# Altium PCB heart.PcbDoc (part 8 of 8)
Units mil, origin at the board's own origin, x right, y up, seen from the top; angles counter-clockwise.
Board outline 5000 x 6000 mil, 2 copper layers (Top Layer, Bottom Layer); 76 components, 43 nets, 328 pads, 50 vias.
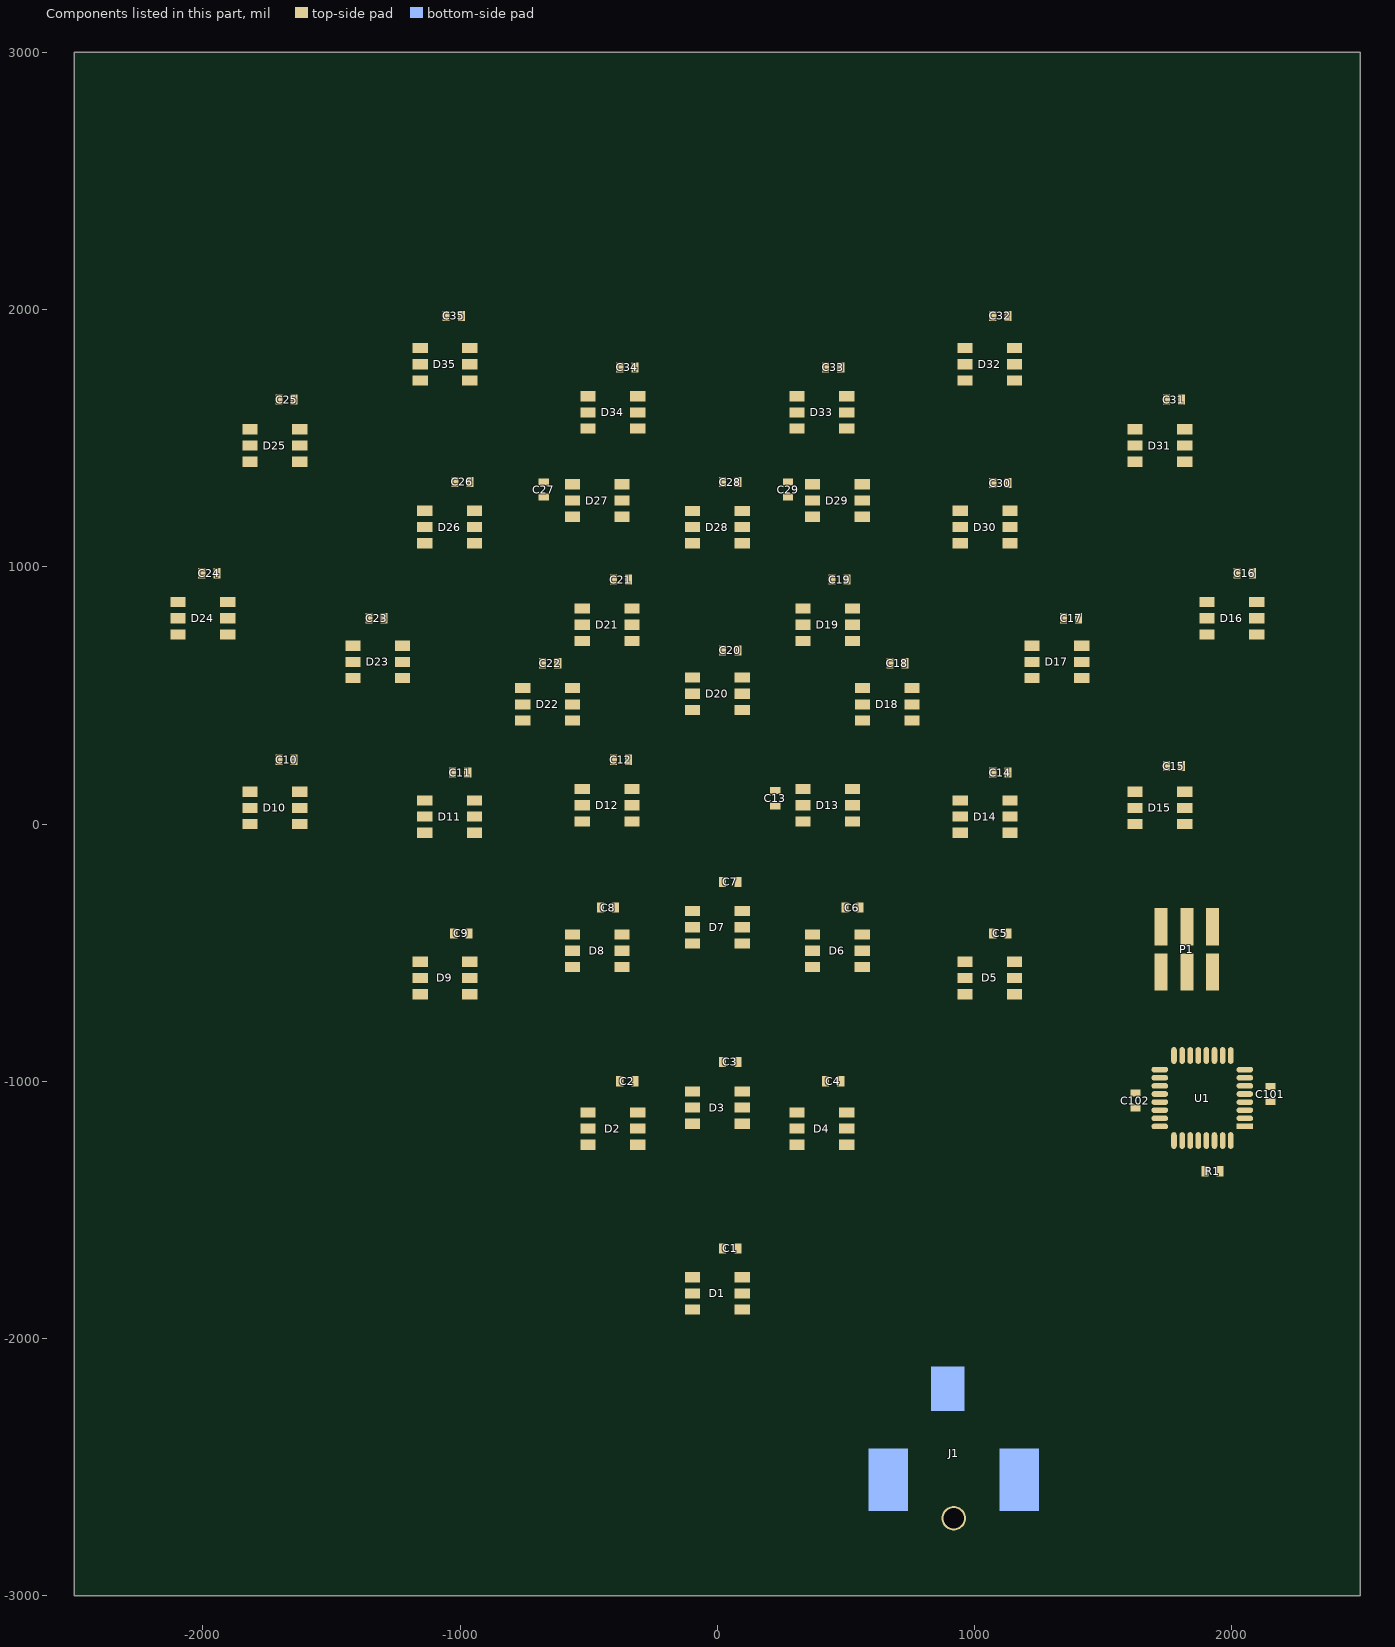
[diagram p8: the components of this part, seen from the top]

## Via types
v1: diameter 48, hole 20, Top Layer to Bottom Layer, 46 vias
v2: diameter 165, hole 150, Top Layer to Bottom Layer, 4 vias

## Nets (pads, with @x,y where several pads share a name; then routed paths per layer and width w, separated by ;. In a path a pad name is that pad's centre, name@x,y a point inside that pad or via, vN(x,y) a via of type N, cw(c..) or ccw(c..) an arc to the next point about the centre after c; other vN are vias at no path point) (continued)
copper on no net: (continued)
  Bottom Layer w2.65: -456.44,-1605.35 -437.85,-1605.35 ; -456.44,-1584.11 -427.23,-1584.11 ; -456.44,-1475.25 -440.51,-1475.25 ; -456.44,-1448.7 -437.85,-1448.7 ; -456.44,-1446.05 -437.85,-1446.05 ; -456.44,-1443.39 -437.85,-1443.39 ; -456.44,-1440.74 -437.85,-1440.74 ; -456.44,-1438.08 -435.2,-1438.08 ; -456.44,-1435.43 -435.2,-1435.43 ; -456.44,-1286.75 -443.16,-1286.75 ; -456.44,-1284.09 -440.51,-1284.09 ; -453.78,-2040.77 -437.85,-2040.77 ; -453.78,-2038.12 -440.51,-2038.12 ; -453.78,-1926.61 -443.16,-1926.61 ; -453.78,-1923.95 -440.51,-1923.95 ; -453.78,-1921.3 -440.51,-1921.3 ; -453.78,-1918.64 -440.51,-1918.64 ; -453.78,-1915.99 -440.51,-1915.99 ; -453.78,-1913.33 -440.51,-1913.33 ; -453.78,-1910.68 -440.51,-1910.68 ; -453.78,-1908.02 -421.92,-1908.02 ; -453.78,-1905.37 -424.58,-1905.37 ; -453.78,-1902.71 -424.58,-1902.71 ; -453.78,-1900.06 -427.23,-1900.06 ; -453.78,-1748.72 -421.92,-1748.72 ; -453.78,-1722.17 -435.2,-1722.17 ; -453.78,-1602.69 -437.85,-1602.69 ; -453.78,-1586.76 -429.89,-1586.76 ; -453.78,-1472.6 -440.51,-1472.6 ; -453.78,-1469.94 -440.51,-1469.94 ; -453.78,-1467.29 -440.51,-1467.29 ; -453.78,-1464.63 -440.51,-1464.63 ; -453.78,-1461.98 -440.51,-1461.98 ; -453.78,-1459.32 -440.51,-1459.32 ; -453.78,-1456.67 -440.51,-1456.67 ; -453.78,-1454.01 -440.51,-1454.01 ; -453.78,-1451.36 -440.51,-1451.36 ; -453.78,-1281.44 -440.51,-1281.44 ; -453.78,-1278.78 -437.85,-1278.78 ; -451.13,-2149.63 -424.58,-2149.63 ; -451.13,-2046.08 -435.2,-2046.08 ; -451.13,-2043.43 -437.85,-2043.43 ; -451.13,-1897.4 -427.23,-1897.4 ; -451.13,-1894.75 -429.89,-1894.75 ; -451.13,-1892.09 -429.89,-1892.09 ; -451.13,-1889.44 -432.54,-1889.44 ; -451.13,-1886.78 -432.54,-1886.78 ; -451.13,-1884.13 -432.54,-1884.13 ; -451.13,-1854.92 -432.54,-1854.92 ; -451.13,-1746.07 -421.92,-1746.07 ; -451.13,-1724.83 -432.54,-1724.83 ; -451.13,-1600.04 -435.2,-1600.04 ; -451.13,-1589.42 -429.89,-1589.42 ; -451.13,-1276.13 -435.2,-1276.13 ; -448.47,-2051.39 -432.54,-2051.39 ; -448.47,-2048.74 -435.2,-2048.74 ; -448.47,-1881.47 -432.54,-1881.47 ; -448.47,-1878.82 -432.54,-1878.82 ; -448.47,-1876.16 -435.2,-1876.16 ; -448.47,-1873.51 -435.2,-1873.51 ; -448.47,-1870.85 -435.2,-1870.85 ; -448.47,-1868.2 -435.2,-1868.2 ; -448.47,-1865.54 -435.2,-1865.54 ; -448.47,-1862.89 -435.2,-1862.89 ; -448.47,-1860.23 -435.2,-1860.23 ; -448.47,-1857.58 -435.2,-1857.58 ; -448.47,-1743.41 -424.58,-1743.41 ; -448.47,-1727.48 -432.54,-1727.48 ; -448.47,-1597.38 -435.2,-1597.38 ; -448.47,-1592.07 -432.54,-1592.07 ; -448.47,-1504.46 -432.54,-1504.46 ; -448.47,-1501.8 -435.2,-1501.8 ; -448.47,-1499.15 -435.2,-1499.15 ; -448.47,-1496.49 -435.2,-1496.49 ; -448.47,-1493.84 -435.2,-1493.84 ; -448.47,-1273.47 -432.54,-1273.47 ; -448.47,-1270.82 -427.23,-1270.82 ; -445.82,-2054.05 -429.89,-2054.05 ; -445.82,-1740.76 -424.58,-1740.76 ; -445.82,-1730.14 -429.89,-1730.14 ; -445.82,-1594.73 -432.54,-1594.73 ; -445.82,-1515.08 -432.54,-1515.08 ; -445.82,-1512.42 -432.54,-1512.42 ; -445.82,-1509.77 -432.54,-1509.77 ; -445.82,-1507.11 -432.54,-1507.11 ; -445.82,-1268.16 -421.92,-1268.16 ; -443.16,-2059.36 -421.92,-2059.36 ; -443.16,-2056.7 -427.23,-2056.7 ; -443.16,-1836.34 -429.89,-1836.34 ; -443.16,-1833.68 -429.89,-1833.68 ; -443.16,-1831.03 -429.89,-1831.03 ; -443.16,-1828.37 -429.89,-1828.37 ; -443.16,-1738.1 -427.23,-1738.1 ; -443.16,-1732.79 -427.23,-1732.79 ; -443.16,-1525.7 -429.89,-1525.7 ; -443.16,-1523.04 -429.89,-1523.04 ; -443.16,-1520.39 -429.89,-1520.39 ; -443.16,-1517.73 -429.89,-1517.73 ; -443.16,-1419.5 -424.58,-1419.5 ; -440.51,-2062.01 -416.61,-2062.01 ; -440.51,-1825.72 -427.23,-1825.72 ; -440.51,-1823.06 -427.23,-1823.06 ; -440.51,-1820.41 -427.23,-1820.41 ; -440.51,-1817.75 -427.23,-1817.75 ; -440.51,-1735.45 -427.23,-1735.45 ; -440.51,-1576.14 -427.23,-1576.14 ; -440.51,-1538.97 -403.34,-1538.97 ; -440.51,-1536.32 -408.65,-1536.32 ; -440.51,-1533.66 -427.23,-1533.66 ; -440.51,-1531.01 -427.23,-1531.01 ; -440.51,-1528.35 -427.23,-1528.35 ; -440.51,-1416.84 -421.92,-1416.84 ; -440.51,-1265.51 -379.44,-1265.51 ; -437.85,-2229.28 -408.65,-2229.28 ; -437.85,-2064.67 -374.13,-2064.67 ; -437.85,-1910.68 -419.27,-1910.68 ; -437.85,-1815.1 -424.58,-1815.1 ; -437.85,-1812.44 -424.58,-1812.44 ; -437.85,-1809.79 -424.58,-1809.79 ; -437.85,-1807.13 -424.58,-1807.13 ; -437.85,-1804.48 -421.92,-1804.48 ; -437.85,-1573.49 -427.23,-1573.49 ; -437.85,-1570.83 -424.58,-1570.83 ; -437.85,-1568.18 -424.58,-1568.18 ; -437.85,-1565.52 -424.58,-1565.52 ; -437.85,-1562.87 -424.58,-1562.87 ; -437.85,-1560.21 -424.58,-1560.21 ; -437.85,-1557.56 -424.58,-1557.56 ; -437.85,-1554.9 -424.58,-1554.9 ; -437.85,-1552.25 -421.92,-1552.25 ; -437.85,-1549.59 -419.27,-1549.59 ; -437.85,-1546.94 -416.61,-1546.94 ; -437.85,-1544.28 -413.96,-1544.28 ; -437.85,-1541.63 -400.68,-1541.63 ; -437.85,-1414.19 -419.27,-1414.19 ; -437.85,-1262.85 -382.1,-1262.85 ; -435.2,-2067.32 -376.79,-2067.32 ; -435.2,-1913.33 -416.61,-1913.33 ; -435.2,-1801.82 -421.92,-1801.82 ; -435.2,-1799.17 -421.92,-1799.17 ; -435.2,-1796.51 -421.92,-1796.51 ; -435.2,-1793.86 -400.68,-1793.86 ; -435.2,-1411.53 -413.96,-1411.53 ; -435.2,-1260.2 -387.41,-1260.2 ; -432.54,-1915.99 -413.96,-1915.99 ; -432.54,-1791.2 -398.03,-1791.2 ; -432.54,-1788.55 -403.34,-1788.55 ; -432.54,-1785.89 -408.65,-1785.89 ; -432.54,-1783.24 -411.3,-1783.24 ; -432.54,-1780.58 -413.96,-1780.58 ; -432.54,-1777.93 -416.61,-1777.93 ; -432.54,-1775.27 -419.27,-1775.27 ; -432.54,-1772.62 -419.27,-1772.62 ; -432.54,-1769.96 -419.27,-1769.96 ; -432.54,-1767.31 -419.27,-1767.31 ; -432.54,-1764.65 -419.27,-1764.65 ; -432.54,-1762 -419.27,-1762 ; -432.54,-1759.34 -419.27,-1759.34 ; -432.54,-1756.69 -419.27,-1756.69 ; -432.54,-1754.03 -421.92,-1754.03 ; -432.54,-1408.88 -411.3,-1408.88 ; -432.54,-1286.75 -390.06,-1286.75 ; -429.89,-2250.52 -307.76,-2250.52 ; -429.89,-2226.63 -405.99,-2226.63 ; -429.89,-2069.98 -379.44,-2069.98 ; -429.89,-1918.64 -411.3,-1918.64 ; -429.89,-1406.22 -405.99,-1406.22 ; -429.89,-1284.09 -392.72,-1284.09 ; -429.89,-1257.54 -390.06,-1257.54 ; -427.23,-2162.91 -403.34,-2162.91 ; -427.23,-1921.3 -405.99,-1921.3 ; -427.23,-1403.57 -395.37,-1403.57 ; -427.23,-1289.4 -390.06,-1289.4 ; -427.23,-1281.44 -395.37,-1281.44 ; -424.58,-2223.97 -403.34,-2223.97 ; -424.58,-2072.63 -384.75,-2072.63 ; -424.58,-1923.95 -400.68,-1923.95 ; -424.58,-1236.3 -416.61,-1236.3 ; -421.92,-2247.87 -307.76,-2247.87 ; -421.92,-2165.56 -400.68,-2165.56 ; -421.92,-1926.61 -392.72,-1926.61 ; -421.92,-1400.91 -331.65,-1400.91 ; -421.92,-1292.06 -387.41,-1292.06 ; -421.92,-1278.78 -398.03,-1278.78 ; -419.27,-2221.32 -400.68,-2221.32 ; -419.27,-1398.26 -352.89,-1398.26 ; -419.27,-1254.89 -392.72,-1254.89 ; -416.61,-2245.21 -307.76,-2245.21 ; -416.61,-2218.66 -400.68,-2218.66 ; -416.61,-2168.22 -400.68,-2168.22 ; -416.61,-2075.29 -387.41,-2075.29 ; -416.61,-1929.26 -326.34,-1929.26 ; -416.61,-1294.71 -387.41,-1294.71 ; -413.96,-2216.01 -398.03,-2216.01 ; -413.96,-2173.53 -398.03,-2173.53 ; -413.96,-2170.87 -398.03,-2170.87 ; -413.96,-1931.92 -323.69,-1931.92 ; -413.96,-1395.6 -358.2,-1395.6 ; -413.96,-1276.13 -405.99,-1276.13 ; -411.3,-2242.56 -307.76,-2242.56 ; -411.3,-2213.35 -398.03,-2213.35 ; -411.3,-2176.18 -395.37,-2176.18 ; -411.3,-1228.34 -403.34,-1228.34 ; -408.65,-2239.9 -307.76,-2239.9 ; -408.65,-2210.7 -395.37,-2210.7 ; -408.65,-2208.04 -395.37,-2208.04 ; -408.65,-2181.49 -392.72,-2181.49 ; -408.65,-2178.84 -395.37,-2178.84 ; -408.65,-1934.57 -350.24,-1934.57 ; -408.65,-1297.37 -387.41,-1297.37 ; -408.65,-1252.23 -392.72,-1252.23 ; -408.65,-1249.58 -392.72,-1249.58 ; -408.65,-1246.92 -395.37,-1246.92 ; -405.99,-2205.39 -392.72,-2205.39 ; -405.99,-2202.73 -368.82,-2202.73 ; -405.99,-2200.08 -371.48,-2200.08 ; -405.99,-2197.42 -374.13,-2197.42 ; -405.99,-2194.77 -376.79,-2194.77 ; -405.99,-2192.11 -382.1,-2192.11 ; -405.99,-2189.46 -387.41,-2189.46 ; -405.99,-2186.8 -392.72,-2186.8 ; -405.99,-2184.15 -392.72,-2184.15 ; -405.99,-2104.49 -403.34,-2104.49 ; -405.99,-1392.95 -363.51,-1392.95 ; -405.99,-1339.85 -395.37,-1339.85 ; -405.99,-1337.19 -387.41,-1337.19 ; -405.99,-1305.33 -387.41,-1305.33 ; -405.99,-1302.68 -387.41,-1302.68 ; -405.99,-1300.02 -387.41,-1300.02 ; -405.99,-1244.27 -395.37,-1244.27 ; -405.99,-1241.61 -395.37,-1241.61 ; -405.99,-1238.96 -395.37,-1238.96 ; -405.99,-1236.3 -398.03,-1236.3 ; -405.99,-1233.65 -398.03,-1233.65 ; -405.99,-1230.99 -400.68,-1230.99 ; -405.99,-1217.72 -307.76,-1217.72 ; -403.34,-2237.25 -307.76,-2237.25 ; -403.34,-2101.84 -398.03,-2101.84 ; -403.34,-2083.25 -387.41,-2083.25 ; -403.34,-2080.6 -387.41,-2080.6 ; -403.34,-2077.94 -387.41,-2077.94 ; -403.34,-1937.23 -358.2,-1937.23 ; -403.34,-1310.64 -390.06,-1310.64 ; -403.34,-1307.99 -387.41,-1307.99 ; -400.68,-2234.59 -382.1,-2234.59 ; -400.68,-2099.18 -395.37,-2099.18 ; -400.68,-2096.53 -392.72,-2096.53 ; -400.68,-2093.87 -390.06,-2093.87 ; -400.68,-2091.22 -390.06,-2091.22 ; -400.68,-2088.56 -390.06,-2088.56 ; -400.68,-2085.91 -390.06,-2085.91 ; -400.68,-1992.98 -382.1,-1992.98 ; -400.68,-1334.54 -382.1,-1334.54 ; -400.68,-1318.61 -395.37,-1318.61 ; -400.68,-1315.95 -392.72,-1315.95 ; -400.68,-1313.3 -390.06,-1313.3 ; -400.68,-1268.16 -376.79,-1268.16 ; -398.03,-2231.94 -384.75,-2231.94 ; -398.03,-1990.33 -392.72,-1990.33 ; -398.03,-1788.55 -395.37,-1788.55 ; -398.03,-1220.37 -307.76,-1220.37 ; -395.37,-2229.28 -384.75,-2229.28 ; -395.37,-2157.6 -307.76,-2157.6 ; -395.37,-2154.94 -307.76,-2154.94 ; -395.37,-2152.28 -307.76,-2152.28 ; -395.37,-2149.63 -307.76,-2149.63 ; -395.37,-2146.97 -307.76,-2146.97 ; -395.37,-2144.32 -307.76,-2144.32 ; -395.37,-2141.66 -307.76,-2141.66 ; -395.37,-2139.01 -307.76,-2139.01 ; -395.37,-2136.35 -307.76,-2136.35 ; -395.37,-2133.7 -307.76,-2133.7 ; -395.37,-2131.04 -307.76,-2131.04 ; -395.37,-2128.39 -307.76,-2128.39 ; -395.37,-2125.73 -307.76,-2125.73 ; -395.37,-2123.08 -307.76,-2123.08 ; -395.37,-2120.42 -307.76,-2120.42 ; -395.37,-2117.77 -307.76,-2117.77 ; -395.37,-2115.11 -307.76,-2115.11 ; -395.37,-2112.46 -307.76,-2112.46 ; -395.37,-2051.39 -392.72,-2051.39 ; -395.37,-2048.74 -390.06,-2048.74 ; -395.37,-2046.08 -387.41,-2046.08 ; -395.37,-2043.43 -384.75,-2043.43 ; -395.37,-2040.77 -382.1,-2040.77 ; -395.37,-2038.12 -382.1,-2038.12 ; -395.37,-2035.46 -382.1,-2035.46 ; -395.37,-2032.81 -382.1,-2032.81 ; -395.37,-2030.15 -382.1,-2030.15 ; -395.37,-2027.5 -382.1,-2027.5 ; -395.37,-2024.84 -382.1,-2024.84 ; -395.37,-2022.19 -382.1,-2022.19 ; -395.37,-2019.53 -384.75,-2019.53 ; -395.37,-2016.88 -384.75,-2016.88 ; -395.37,-2014.22 -387.41,-2014.22 ; -395.37,-2011.57 -390.06,-2011.57 ; -395.37,-2008.91 -392.72,-2008.91 ; -395.37,-1995.64 -376.79,-1995.64 ; -395.37,-1979.71 -307.76,-1979.71 ; -395.37,-1977.05 -307.76,-1977.05 ; -395.37,-1974.4 -307.76,-1974.4 ; -395.37,-1971.74 -307.76,-1971.74 ; -395.37,-1969.09 -363.51,-1969.09 ; -395.37,-1966.43 -363.51,-1966.43 ; -395.37,-1963.78 -363.51,-1963.78 ; -395.37,-1961.12 -363.51,-1961.12 ; -395.37,-1958.47 -358.2,-1958.47 ; -395.37,-1955.81 -352.89,-1955.81 ; -395.37,-1953.16 -350.24,-1953.16 ; -395.37,-1950.5 -347.58,-1950.5 ; -395.37,-1915.99 -363.51,-1915.99 ; -395.37,-1913.33 -358.2,-1913.33 ; -395.37,-1910.68 -355.55,-1910.68 ; -395.37,-1908.02 -352.89,-1908.02 ; -395.37,-1905.37 -350.24,-1905.37 ; -395.37,-1902.71 -347.58,-1902.71 ; -395.37,-1900.06 -344.93,-1900.06 ; -395.37,-1897.4 -344.93,-1897.4 ; -395.37,-1894.75 -371.48,-1894.75 ; -395.37,-1892.09 -379.44,-1892.09 ; -395.37,-1889.44 -382.1,-1889.44 ; -395.37,-1886.78 -384.75,-1886.78 ; -395.37,-1884.13 -387.41,-1884.13 ; -395.37,-1881.47 -390.06,-1881.47 ; -395.37,-1878.82 -392.72,-1878.82 ; -395.37,-1876.16 -392.72,-1876.16 ; -395.37,-1844.3 -392.72,-1844.3 ; -395.37,-1841.65 -390.06,-1841.65 ; -395.37,-1838.99 -390.06,-1838.99 ; -395.37,-1836.34 -387.41,-1836.34 ; -395.37,-1833.68 -384.75,-1833.68 ; -395.37,-1831.03 -382.1,-1831.03 ; -395.37,-1828.37 -376.79,-1828.37 ; -395.37,-1825.72 -374.13,-1825.72 ; -395.37,-1823.06 -366.17,-1823.06 ; -395.37,-1820.41 -307.76,-1820.41 ; -395.37,-1817.75 -307.76,-1817.75 ; -395.37,-1815.1 -307.76,-1815.1 ; -395.37,-1812.44 -307.76,-1812.44 ; -395.37,-1809.79 -307.76,-1809.79 ; -395.37,-1807.13 -307.76,-1807.13 ; -395.37,-1804.48 -307.76,-1804.48 ; -395.37,-1801.82 -307.76,-1801.82 ; -395.37,-1767.31 -392.72,-1767.31 ; -395.37,-1764.65 -392.72,-1764.65 ; -395.37,-1762 -390.06,-1762 ; -395.37,-1759.34 -390.06,-1759.34 ; -395.37,-1756.69 -387.41,-1756.69 ; -395.37,-1754.03 -307.76,-1754.03 ; -395.37,-1751.38 -307.76,-1751.38 ; -395.37,-1748.72 -307.76,-1748.72 ; -395.37,-1746.07 -307.76,-1746.07 ; -395.37,-1743.41 -307.76,-1743.41 ; -395.37,-1740.76 -307.76,-1740.76 ; -395.37,-1738.1 -307.76,-1738.1 ; -395.37,-1735.45 -307.76,-1735.45 ; -395.37,-1732.79 -307.76,-1732.79 ; -395.37,-1730.14 -307.76,-1730.14 ; -395.37,-1727.48 -307.76,-1727.48 ; -395.37,-1724.83 -307.76,-1724.83 ; -395.37,-1722.17 -307.76,-1722.17 ; -395.37,-1719.52 -307.76,-1719.52 ; -395.37,-1716.86 -307.76,-1716.86 ; -395.37,-1714.21 -307.76,-1714.21 ; -395.37,-1711.55 -307.76,-1711.55 ; -395.37,-1708.9 -307.76,-1708.9 ; -395.37,-1706.24 -307.76,-1706.24 ; -395.37,-1703.59 -307.76,-1703.59 ; -395.37,-1700.93 -307.76,-1700.93 ; -395.37,-1698.28 -307.76,-1698.28 ; -395.37,-1695.62 -307.76,-1695.62 ; -395.37,-1692.97 -307.76,-1692.97 ; -395.37,-1690.31 -307.76,-1690.31 ; -395.37,-1687.66 -307.76,-1687.66 ; -395.37,-1685 -307.76,-1685 ; -395.37,-1682.35 -307.76,-1682.35 ; -395.37,-1679.69 -307.76,-1679.69 ; -395.37,-1677.04 -307.76,-1677.04 ; -395.37,-1674.38 -307.76,-1674.38 ; -395.37,-1671.73 -307.76,-1671.73 ; -395.37,-1669.07 -307.76,-1669.07 ; -395.37,-1666.42 -307.76,-1666.42 ; -395.37,-1663.76 -307.76,-1663.76 ; -395.37,-1661.11 -307.76,-1661.11 ; -395.37,-1658.45 -307.76,-1658.45 ; -395.37,-1655.8 -307.76,-1655.8 ; -395.37,-1653.14 -307.76,-1653.14 ; -395.37,-1650.49 -307.76,-1650.49 ; -395.37,-1647.83 -307.76,-1647.83 ; -395.37,-1645.18 -307.76,-1645.18 ; -395.37,-1642.52 -307.76,-1642.52 ; -395.37,-1639.86 -307.76,-1639.86 ; -395.37,-1637.21 -307.76,-1637.21 ; -395.37,-1634.55 -307.76,-1634.55 ; -395.37,-1631.9 -307.76,-1631.9 ; -395.37,-1629.24 -307.76,-1629.24 ; -395.37,-1626.59 -307.76,-1626.59 ; -395.37,-1623.93 -307.76,-1623.93 ; -395.37,-1621.28 -307.76,-1621.28 ; -395.37,-1618.62 -307.76,-1618.62 ; -395.37,-1615.97 -307.76,-1615.97 ; -395.37,-1613.31 -307.76,-1613.31 ; -395.37,-1610.66 -307.76,-1610.66 ; -395.37,-1608 -307.76,-1608 ; -395.37,-1605.35 -307.76,-1605.35 ; -395.37,-1602.69 -307.76,-1602.69 ; -395.37,-1600.04 -307.76,-1600.04 ; -395.37,-1597.38 -307.76,-1597.38 ; -395.37,-1594.73 -307.76,-1594.73 ; -395.37,-1592.07 -307.76,-1592.07 ; -395.37,-1589.42 -307.76,-1589.42 ; -395.37,-1586.76 -307.76,-1586.76 ; -395.37,-1584.11 -307.76,-1584.11 ; -395.37,-1581.45 -307.76,-1581.45 ; -395.37,-1578.8 -307.76,-1578.8 ; -395.37,-1576.14 -307.76,-1576.14 ; -395.37,-1533.66 -307.76,-1533.66 ; -395.37,-1531.01 -307.76,-1531.01 ; -395.37,-1528.35 -307.76,-1528.35 ; -395.37,-1525.7 -307.76,-1525.7 ; -395.37,-1523.04 -307.76,-1523.04 ; -395.37,-1520.39 -307.76,-1520.39 ; -395.37,-1517.73 -307.76,-1517.73 ; -395.37,-1515.08 -307.76,-1515.08 ; -395.37,-1512.42 -307.76,-1512.42 ; -395.37,-1509.77 -307.76,-1509.77 ; -395.37,-1507.11 -374.13,-1507.11 ; -395.37,-1504.46 -379.44,-1504.46 ; -395.37,-1501.8 -384.75,-1501.8 ; -395.37,-1499.15 -387.41,-1499.15 ; -395.37,-1496.49 -390.06,-1496.49 ; -395.37,-1443.39 -390.06,-1443.39 ; -395.37,-1440.74 -387.41,-1440.74 ; -395.37,-1438.08 -382.1,-1438.08 ; -395.37,-1435.43 -347.58,-1435.43 ; -395.37,-1432.77 -350.24,-1432.77 ; -395.37,-1430.12 -350.24,-1430.12 ; -395.37,-1427.46 -352.89,-1427.46 ; -395.37,-1424.81 -355.55,-1424.81 ; -395.37,-1422.15 -358.2,-1422.15 ; -395.37,-1419.5 -360.86,-1419.5 ; -395.37,-1416.84 -366.17,-1416.84 ; -395.37,-1414.19 -371.48,-1414.19 ; -395.37,-1390.29 -376.79,-1390.29 ; -395.37,-1379.67 -352.89,-1379.67 ; -395.37,-1377.02 -355.55,-1377.02 ; -395.37,-1374.36 -360.86,-1374.36 ; -395.37,-1371.71 -363.51,-1371.71 ; -395.37,-1369.05 -368.82,-1369.05 ; -395.37,-1366.4 -368.82,-1366.4 ; -395.37,-1363.74 -368.82,-1363.74 ; -395.37,-1361.09 -368.82,-1361.09 ; -395.37,-1358.43 -307.76,-1358.43 ; -395.37,-1355.78 -307.76,-1355.78 ; -395.37,-1353.12 -307.76,-1353.12 ; -395.37,-1350.47 -307.76,-1350.47 ; -395.37,-1331.88 -379.44,-1331.88 ; -395.37,-1270.82 -374.13,-1270.82 ; -395.37,-1223.03 -307.76,-1223.03 ; -392.72,-2226.63 -382.1,-2226.63 ; -392.72,-2223.97 -382.1,-2223.97 ; -392.72,-2162.91 -307.76,-2162.91 ; -392.72,-2160.25 -307.76,-2160.25 ; -392.72,-2109.8 -307.76,-2109.8 ; -392.72,-2062.01 -371.48,-2062.01 ; -392.72,-1939.88 -366.17,-1939.88 ; -392.72,-1799.17 -307.76,-1799.17 ; -392.72,-1573.49 -307.76,-1573.49 ; -392.72,-1538.97 -307.76,-1538.97 ; -392.72,-1536.32 -307.76,-1536.32 ; -392.72,-1477.91 -382.1,-1477.91 ; -392.72,-1475.25 -382.1,-1475.25 ; -392.72,-1472.6 -384.75,-1472.6 ; -392.72,-1469.94 -384.75,-1469.94 ; -392.72,-1467.29 -384.75,-1467.29 ; -392.72,-1464.63 -384.75,-1464.63 ; -392.72,-1461.98 -384.75,-1461.98 ; -392.72,-1329.23 -376.79,-1329.23 ; -392.72,-1225.68 -307.76,-1225.68 ; -390.06,-2221.32 -379.44,-2221.32 ; -390.06,-2218.66 -379.44,-2218.66 ; -390.06,-2168.22 -307.76,-2168.22 ; -390.06,-2165.56 -307.76,-2165.56 ; -390.06,-2107.15 -307.76,-2107.15 ; -390.06,-1998.29 -374.13,-1998.29 ; -390.06,-1796.51 -307.76,-1796.51 ; -390.06,-1570.83 -307.76,-1570.83 ; -390.06,-1568.18 -307.76,-1568.18 ; -390.06,-1565.52 -307.76,-1565.52 ; -390.06,-1562.87 -307.76,-1562.87 ; -390.06,-1560.21 -307.76,-1560.21 ; -390.06,-1557.56 -307.76,-1557.56 ; -390.06,-1554.9 -307.76,-1554.9 ; -390.06,-1552.25 -307.76,-1552.25 ; -390.06,-1549.59 -307.76,-1549.59 ; -390.06,-1546.94 -307.76,-1546.94 ; -390.06,-1544.28 -307.76,-1544.28 ; -390.06,-1541.63 -307.76,-1541.63 ; -390.06,-1483.22 -376.79,-1483.22 ; -390.06,-1480.56 -379.44,-1480.56 ; -390.06,-1459.32 -384.75,-1459.32 ; -390.06,-1456.67 -384.75,-1456.67 ; -390.06,-1347.81 -307.76,-1347.81 ; -390.06,-1326.57 -374.13,-1326.57 ; -390.06,-1273.47 -371.48,-1273.47 ; -390.06,-1230.99 -307.76,-1230.99 ; -390.06,-1228.34 -307.76,-1228.34 ; -387.41,-2216.01 -376.79,-2216.01 ; -387.41,-2173.53 -307.76,-2173.53 ; -387.41,-2170.87 -307.76,-2170.87 ; -387.41,-2104.49 -307.76,-2104.49 ; -387.41,-2059.36 -368.82,-2059.36 ; -387.41,-2000.95 -371.48,-2000.95 ; -387.41,-1868.2 -379.44,-1868.2 ; -387.41,-1865.54 -379.44,-1865.54 ; -387.41,-1862.89 -379.44,-1862.89 ; -387.41,-1860.23 -379.44,-1860.23 ; -387.41,-1857.58 -379.44,-1857.58 ; -387.41,-1854.92 -376.79,-1854.92 ; -387.41,-1793.86 -307.76,-1793.86 ; -387.41,-1488.53 -336.96,-1488.53 ; -387.41,-1485.87 -371.48,-1485.87 ; -387.41,-1454.01 -384.75,-1454.01 ; -387.41,-1451.36 -382.1,-1451.36 ; -387.41,-1323.92 -371.48,-1323.92 ; -387.41,-1276.13 -371.48,-1276.13 ; -387.41,-1238.96 -307.76,-1238.96 ; -387.41,-1236.3 -307.76,-1236.3 ; -387.41,-1233.65 -307.76,-1233.65 ; -384.75,-2178.84 -307.76,-2178.84 ; -384.75,-2176.18 -307.76,-2176.18 ; -384.75,-2101.84 -307.76,-2101.84 ; -384.75,-2099.18 -307.76,-2099.18 ; -384.75,-2056.7 -366.17,-2056.7 ; -384.75,-2003.6 -368.82,-2003.6 ; -384.75,-1982.36 -307.76,-1982.36 ; -384.75,-1918.64 -374.13,-1918.64 ; -384.75,-1873.51 -379.44,-1873.51 ; -384.75,-1870.85 -379.44,-1870.85 ; -384.75,-1852.27 -374.13,-1852.27 ; -384.75,-1849.61 -371.48,-1849.61 ; -384.75,-1846.96 -368.82,-1846.96 ; -384.75,-1791.2 -307.76,-1791.2 ; -384.75,-1788.55 -307.76,-1788.55 ; -384.75,-1785.89 -307.76,-1785.89 ; -384.75,-1783.24 -307.76,-1783.24 ; -384.75,-1777.93 -307.76,-1777.93 ; -384.75,-1775.27 -307.76,-1775.27 ; -384.75,-1772.62 -307.76,-1772.62 ; -384.75,-1769.96 -307.76,-1769.96 ; -384.75,-1767.31 -307.76,-1767.31 ; -384.75,-1764.65 -307.76,-1764.65 ; -384.75,-1762 -307.76,-1762 ; -384.75,-1759.34 -307.76,-1759.34 ; -384.75,-1756.69 -307.76,-1756.69 ; -384.75,-1491.18 -339.62,-1491.18 ; -384.75,-1321.26 -368.82,-1321.26 ; -384.75,-1278.78 -368.82,-1278.78 ; -384.75,-1249.58 -307.76,-1249.58 ; -384.75,-1246.92 -307.76,-1246.92 ; -384.75,-1244.27 -307.76,-1244.27 ; -384.75,-1241.61 -307.76,-1241.61 ; -382.1,-2181.49 -307.76,-2181.49 ; -382.1,-2096.53 -307.76,-2096.53 ; -382.1,-2093.87 -307.76,-2093.87 ; -382.1,-2091.22 -307.76,-2091.22 ; -382.1,-2054.05 -366.17,-2054.05 ; -382.1,-2006.26 -366.17,-2006.26 ; -382.1,-1878.82 -376.79,-1878.82 ; -382.1,-1876.16 -379.44,-1876.16 ; -382.1,-1844.3 -363.51,-1844.3 ; -382.1,-1780.58 -307.76,-1780.58 ; -382.1,-1345.16 -307.76,-1345.16 ; -382.1,-1318.61 -368.82,-1318.61 ; -382.1,-1315.95 -368.82,-1315.95 ; -382.1,-1284.09 -366.17,-1284.09 ; -382.1,-1281.44 -368.82,-1281.44 ; -382.1,-1252.23 -307.76,-1252.23 ; -379.44,-2088.56 -307.76,-2088.56 ; -379.44,-2085.91 -307.76,-2085.91 ; -379.44,-2083.25 -307.76,-2083.25 ; -379.44,-2080.6 -307.76,-2080.6 ; -379.44,-2051.39 -363.51,-2051.39 ; -379.44,-2008.91 -363.51,-2008.91 ; -379.44,-1985.02 -307.76,-1985.02 ; -379.44,-1841.65 -331.65,-1841.65 ; -379.44,-1493.84 -344.93,-1493.84 ; -379.44,-1342.5 -307.76,-1342.5 ; -379.44,-1313.3 -366.17,-1313.3 ; -379.44,-1310.64 -366.17,-1310.64 ; -379.44,-1307.99 -366.17,-1307.99 ; -379.44,-1305.33 -363.51,-1305.33 ; -379.44,-1292.06 -366.17,-1292.06 ; -379.44,-1289.4 -366.17,-1289.4 ; -379.44,-1286.75 -366.17,-1286.75 ; -379.44,-1254.89 -307.76,-1254.89 ; -376.79,-2205.39 -368.82,-2205.39 ; -376.79,-2184.15 -307.76,-2184.15 ; -376.79,-2048.74 -363.51,-2048.74 ; -376.79,-2046.08 -360.86,-2046.08 ; -376.79,-2014.22 -363.51,-2014.22 ; -376.79,-2011.57 -363.51,-2011.57 ; -376.79,-1881.47 -374.13,-1881.47 ; -376.79,-1838.99 -334.31,-1838.99 ; -376.79,-1467.29 -350.24,-1467.29 ; -376.79,-1464.63 -347.58,-1464.63 ; -376.79,-1461.98 -347.58,-1461.98 ; -376.79,-1459.32 -344.93,-1459.32 ; -376.79,-1403.57 -331.65,-1403.57 ; -376.79,-1302.68 -363.51,-1302.68 ; -376.79,-1300.02 -363.51,-1300.02 ; -376.79,-1297.37 -363.51,-1297.37 ; -376.79,-1294.71 -363.51,-1294.71 ; -374.13,-2234.59 -307.76,-2234.59 ; -374.13,-2077.94 -307.76,-2077.94 ; -374.13,-2043.43 -360.86,-2043.43 ; -374.13,-2040.77 -360.86,-2040.77 ; -374.13,-2038.12 -358.2,-2038.12 ; -374.13,-2022.19 -360.86,-2022.19 ; -374.13,-2019.53 -360.86,-2019.53 ; -374.13,-2016.88 -360.86,-2016.88 ; -374.13,-1987.67 -307.76,-1987.67 ; -374.13,-1836.34 -339.62,-1836.34 ; -374.13,-1496.49 -347.58,-1496.49 ; -374.13,-1472.6 -352.89,-1472.6 ; -374.13,-1469.94 -350.24,-1469.94 ; -374.13,-1456.67 -344.93,-1456.67 ; -374.13,-1454.01 -344.93,-1454.01 ; -374.13,-1339.85 -307.76,-1339.85 ; -374.13,-1257.54 -307.76,-1257.54 ; -371.48,-2231.94 -307.76,-2231.94 ; -371.48,-2208.04 -366.17,-2208.04 ; -371.48,-2186.8 -307.76,-2186.8 ; -371.48,-2075.29 -307.76,-2075.29 ; -371.48,-2035.46 -358.2,-2035.46 ; -371.48,-2032.81 -358.2,-2032.81 ; -371.48,-2030.15 -358.2,-2030.15 ; -371.48,-2027.5 -358.2,-2027.5 ; -371.48,-2024.84 -358.2,-2024.84 ; -371.48,-1870.85 -339.62,-1870.85 ; -371.48,-1868.2 -342.27,-1868.2 ; -371.48,-1865.54 -342.27,-1865.54 ; -371.48,-1862.89 -344.93,-1862.89 ; -371.48,-1475.25 -355.55,-1475.25 ; -371.48,-1451.36 -344.93,-1451.36 ; -371.48,-1337.19 -307.76,-1337.19 ; -371.48,-1260.2 -307.76,-1260.2 ; -368.82,-2213.35 -366.17,-2213.35 ; -368.82,-2210.7 -366.17,-2210.7 ; -368.82,-2189.46 -307.76,-2189.46 ; -368.82,-2072.63 -307.76,-2072.63 ; -368.82,-1990.33 -307.76,-1990.33 ; -368.82,-1876.16 -339.62,-1876.16 ; -368.82,-1873.51 -339.62,-1873.51 ; -368.82,-1860.23 -344.93,-1860.23 ; -368.82,-1857.58 -347.58,-1857.58 ; -368.82,-1833.68 -344.93,-1833.68 ; -368.82,-1499.15 -358.2,-1499.15 ; -368.82,-1448.7 -344.93,-1448.7 ; -368.82,-1382.33 -350.24,-1382.33 ; -368.82,-1334.54 -307.76,-1334.54 ; -368.82,-1262.85 -307.76,-1262.85 ; -366.17,-2229.28 -307.76,-2229.28 ; -366.17,-2192.11 -307.76,-2192.11 ; -366.17,-2069.98 -307.76,-2069.98 ; -366.17,-1992.98 -307.76,-1992.98 ; -366.17,-1926.61 -326.34,-1926.61 ; -366.17,-1878.82 -339.62,-1878.82 ; -366.17,-1854.92 -350.24,-1854.92 ; -366.17,-1477.91 -360.86,-1477.91 ; -366.17,-1446.05 -344.93,-1446.05 ; -366.17,-1443.39 -344.93,-1443.39 ; -366.17,-1440.74 -347.58,-1440.74 ; -366.17,-1438.08 -347.58,-1438.08 ; -366.17,-1406.22 -334.31,-1406.22 ; -366.17,-1331.88 -307.76,-1331.88 ; -366.17,-1268.16 -307.76,-1268.16 ; -366.17,-1265.51 -307.76,-1265.51 ; -363.51,-2226.63 -307.76,-2226.63 ; -363.51,-2223.97 -307.76,-2223.97 ; -363.51,-2194.77 -307.76,-2194.77 ; -363.51,-2067.32 -307.76,-2067.32 ; -363.51,-1995.64 -307.76,-1995.64 ; -363.51,-1894.75 -342.27,-1894.75 ; -363.51,-1881.47 -339.62,-1881.47 ; -363.51,-1329.23 -307.76,-1329.23 ; -363.51,-1326.57 -307.76,-1326.57 ; -363.51,-1270.82 -307.76,-1270.82 ; -360.86,-2221.32 -307.76,-2221.32 ; -360.86,-2218.66 -307.76,-2218.66 ; -360.86,-2200.08 -307.76,-2200.08 ; -360.86,-2197.42 -307.76,-2197.42 ; -360.86,-2064.67 -307.76,-2064.67 ; -360.86,-1998.29 -307.76,-1998.29 ; -360.86,-1947.85 -344.93,-1947.85 ; -360.86,-1923.95 -329,-1923.95 ; -360.86,-1892.09 -342.27,-1892.09 ; -360.86,-1886.78 -339.62,-1886.78 ; -360.86,-1884.13 -339.62,-1884.13 ; -360.86,-1408.88 -334.31,-1408.88 ; -360.86,-1384.98 -347.58,-1384.98 ; -360.86,-1323.92 -307.76,-1323.92 ; -360.86,-1321.26 -307.76,-1321.26 ; -360.86,-1276.13 -307.76,-1276.13 ; -360.86,-1273.47 -307.76,-1273.47 ; -358.2,-2216.01 -307.76,-2216.01 ; -358.2,-2213.35 -307.76,-2213.35 ; -358.2,-2210.7 -307.76,-2210.7 ; -358.2,-2208.04 -307.76,-2208.04 ; -358.2,-2205.39 -307.76,-2205.39 ; -358.2,-2202.73 -307.76,-2202.73 ; -358.2,-2062.01 -307.76,-2062.01 ; -358.2,-2059.36 -307.76,-2059.36 ; -358.2,-2003.6 -307.76,-2003.6 ; -358.2,-2000.95 -307.76,-2000.95 ; -358.2,-1889.44 -339.62,-1889.44 ; -358.2,-1411.53 -336.96,-1411.53 ; -358.2,-1318.61 -307.76,-1318.61 ; -358.2,-1315.95 -307.76,-1315.95 ; -358.2,-1313.3 -307.76,-1313.3 ; -358.2,-1286.75 -307.76,-1286.75 ; -358.2,-1284.09 -307.76,-1284.09 ; -358.2,-1281.44 -307.76,-1281.44 ; -358.2,-1278.78 -307.76,-1278.78 ; -355.55,-2056.7 -307.76,-2056.7 ; -355.55,-2054.05 -307.76,-2054.05 ; -355.55,-2008.91 -307.76,-2008.91 ; -355.55,-2006.26 -307.76,-2006.26 ; -355.55,-1921.3 -329,-1921.3 ; -355.55,-1485.87 -334.31,-1485.87 ; -355.55,-1310.64 -307.76,-1310.64 ; -355.55,-1307.99 -307.76,-1307.99 ; -355.55,-1305.33 -307.76,-1305.33 ; -355.55,-1302.68 -307.76,-1302.68 ; -355.55,-1300.02 -307.76,-1300.02 ; -355.55,-1297.37 -307.76,-1297.37 ; -355.55,-1294.71 -307.76,-1294.71 ; -355.55,-1292.06 -307.76,-1292.06 ; -355.55,-1289.4 -307.76,-1289.4 ; -352.89,-2051.39 -307.76,-2051.39 ; -352.89,-2048.74 -307.76,-2048.74 ; -352.89,-2046.08 -307.76,-2046.08 ; -352.89,-2016.88 -307.76,-2016.88 ; -352.89,-2014.22 -307.76,-2014.22 ; -352.89,-2011.57 -307.76,-2011.57 ; -352.89,-1945.19 -342.27,-1945.19 ; -352.89,-1844.3 -329,-1844.3 ; -352.89,-1507.11 -307.76,-1507.11 ; -352.89,-1414.19 -334.31,-1414.19 ; -352.89,-1387.64 -350.24,-1387.64 ; -352.89,-1361.09 -307.76,-1361.09 ; -350.24,-2043.43 -307.76,-2043.43 ; -350.24,-2040.77 -307.76,-2040.77 ; -350.24,-2038.12 -307.76,-2038.12 ; -350.24,-2035.46 -307.76,-2035.46 ; -350.24,-2032.81 -307.76,-2032.81 ; -350.24,-2030.15 -307.76,-2030.15 ; -350.24,-2027.5 -307.76,-2027.5 ; -350.24,-2024.84 -307.76,-2024.84 ; -350.24,-2022.19 -307.76,-2022.19 ; -350.24,-2019.53 -307.76,-2019.53 ; -350.24,-1918.64 -329,-1918.64 ; -350.24,-1483.22 -331.65,-1483.22 ; -350.24,-1416.84 -334.31,-1416.84 ; -350.24,-1398.26 -331.65,-1398.26 ; -347.58,-1942.54 -344.93,-1942.54 ; -347.58,-1915.99 -329,-1915.99 ; -347.58,-1846.96 -326.34,-1846.96 ; -347.58,-1823.06 -307.76,-1823.06 ; -347.58,-1480.56 -331.65,-1480.56 ; -347.58,-1419.5 -331.65,-1419.5 ; -344.93,-1969.09 -307.76,-1969.09 ; -344.93,-1913.33 -326.34,-1913.33 ; -344.93,-1504.46 -307.76,-1504.46 ; -344.93,-1477.91 -329,-1477.91 ; -344.93,-1424.81 -329,-1424.81 ; -344.93,-1422.15 -329,-1422.15 ; -344.93,-1395.6 -329,-1395.6 ; -344.93,-1374.36 -342.27,-1374.36 ; -342.27,-1910.68 -326.34,-1910.68 ; -342.27,-1849.61 -326.34,-1849.61 ; -342.27,-1475.25 -329,-1475.25 ; -342.27,-1472.6 -326.34,-1472.6 ; -342.27,-1427.46 -326.34,-1427.46 ; -342.27,-1392.95 -329,-1392.95 ; -342.27,-1379.67 -334.31,-1379.67 ; -342.27,-1377.02 -336.96,-1377.02 ; -342.27,-1363.74 -307.76,-1363.74 ; -339.62,-1955.81 -334.31,-1955.81 ; -339.62,-1934.57 -323.69,-1934.57 ; -339.62,-1908.02 -323.69,-1908.02 ; -339.62,-1852.27 -323.69,-1852.27 ; -339.62,-1825.72 -307.76,-1825.72 ; -339.62,-1501.8 -307.76,-1501.8 ; -339.62,-1469.94 -326.34,-1469.94 ; -339.62,-1467.29 -323.69,-1467.29 ; -339.62,-1435.43 -323.69,-1435.43 ; -339.62,-1432.77 -326.34,-1432.77 ; -339.62,-1430.12 -326.34,-1430.12 ; -339.62,-1390.29 -329,-1390.29 ; -339.62,-1387.64 -329,-1387.64 ; -339.62,-1384.98 -331.65,-1384.98 ; -339.62,-1382.33 -331.65,-1382.33 ; -336.96,-1953.16 -329,-1953.16 ; -336.96,-1937.23 -323.69,-1937.23 ; -336.96,-1905.37 -323.69,-1905.37 ; -336.96,-1902.71 -321.03,-1902.71 ; -336.96,-1857.58 -321.03,-1857.58 ; -336.96,-1854.92 -323.69,-1854.92 ; -336.96,-1499.15 -307.76,-1499.15 ; -336.96,-1464.63 -323.69,-1464.63 ; -336.96,-1461.98 -323.69,-1461.98 ; -336.96,-1459.32 -323.69,-1459.32 ; -336.96,-1456.67 -323.69,-1456.67 ; -336.96,-1454.01 -323.69,-1454.01 ; -336.96,-1451.36 -323.69,-1451.36 ; -336.96,-1448.7 -323.69,-1448.7 ; -336.96,-1446.05 -323.69,-1446.05 ; -336.96,-1443.39 -323.69,-1443.39 ; -336.96,-1440.74 -323.69,-1440.74 ; -336.96,-1438.08 -323.69,-1438.08 ; -336.96,-1366.4 -307.76,-1366.4 ; -334.31,-1966.43 -307.76,-1966.43 ; -334.31,-1950.5 -329,-1950.5 ; -334.31,-1947.85 -326.34,-1947.85 ; -334.31,-1945.19 -323.69,-1945.19 ; -334.31,-1942.54 -323.69,-1942.54 ; -334.31,-1939.88 -323.69,-1939.88 ; -334.31,-1900.06 -321.03,-1900.06 ; -334.31,-1897.4 -318.38,-1897.4 ; -334.31,-1862.89 -318.38,-1862.89 ; -334.31,-1860.23 -321.03,-1860.23 ; -334.31,-1828.37 -307.76,-1828.37 ; -331.65,-1894.75 -318.38,-1894.75 ; -331.65,-1892.09 -318.38,-1892.09 ; -331.65,-1889.44 -318.38,-1889.44 ; -331.65,-1886.78 -318.38,-1886.78 ; -331.65,-1884.13 -318.38,-1884.13 ; -331.65,-1881.47 -318.38,-1881.47 ; -331.65,-1878.82 -318.38,-1878.82 ; -331.65,-1876.16 -318.38,-1876.16 ; -331.65,-1873.51 -318.38,-1873.51 ; -331.65,-1870.85 -318.38,-1870.85 ; -331.65,-1868.2 -318.38,-1868.2 ; -331.65,-1865.54 -318.38,-1865.54 ; -331.65,-1831.03 -307.76,-1831.03 ; -331.65,-1496.49 -307.76,-1496.49 ; -331.65,-1369.05 -307.76,-1369.05 ; -329,-1963.78 -307.76,-1963.78 ; -329,-1493.84 -307.76,-1493.84 ; -329,-1371.71 -307.76,-1371.71 ; -326.34,-1961.12 -307.76,-1961.12 ; -326.34,-1833.68 -307.76,-1833.68 ; -326.34,-1491.18 -307.76,-1491.18 ; -326.34,-1488.53 -307.76,-1488.53 ; -326.34,-1411.53 -307.76,-1411.53 ; -326.34,-1374.36 -307.76,-1374.36 ; -323.69,-1958.47 -307.76,-1958.47 ; -323.69,-1836.34 -307.76,-1836.34 ; -323.69,-1485.87 -307.76,-1485.87 ; -323.69,-1414.19 -307.76,-1414.19 ; -323.69,-1408.88 -307.76,-1408.88 ; -323.69,-1406.22 -307.76,-1406.22 ; -323.69,-1379.67 -307.76,-1379.67 ; -323.69,-1377.02 -307.76,-1377.02 ; -321.03,-1955.81 -307.76,-1955.81 ; -321.03,-1841.65 -307.76,-1841.65 ; -321.03,-1838.99 -307.76,-1838.99 ; -321.03,-1483.22 -307.76,-1483.22 ; -321.03,-1480.56 -307.76,-1480.56 ; -321.03,-1422.15 -307.76,-1422.15 ; -321.03,-1419.5 -307.76,-1419.5 ; -321.03,-1416.84 -307.76,-1416.84 ; -321.03,-1403.57 -307.76,-1403.57 ; -321.03,-1400.91 -307.76,-1400.91 ; -321.03,-1398.26 -307.76,-1398.26 ; -321.03,-1395.6 -307.76,-1395.6 ; -321.03,-1392.95 -307.76,-1392.95 ; -321.03,-1390.29 -307.76,-1390.29 ; -321.03,-1387.64 -307.76,-1387.64 ; -321.03,-1384.98 -307.76,-1384.98 ; -321.03,-1382.33 -307.76,-1382.33 ; -318.38,-1953.16 -307.76,-1953.16 ; -318.38,-1950.5 -307.76,-1950.5 ; -318.38,-1923.95 -307.76,-1923.95 ; -318.38,-1921.3 -307.76,-1921.3 ; -318.38,-1918.64 -307.76,-1918.64 ; -318.38,-1915.99 -307.76,-1915.99 ; -318.38,-1844.3 -307.76,-1844.3 ; -318.38,-1477.91 -307.76,-1477.91 ; -318.38,-1475.25 -307.76,-1475.25 ; -318.38,-1427.46 -307.76,-1427.46 ; -318.38,-1424.81 -307.76,-1424.81 ; -315.72,-1947.85 -307.76,-1947.85 ; -315.72,-1945.19 -307.76,-1945.19 ; -315.72,-1942.54 -307.76,-1942.54 ; -315.72,-1939.88 -307.76,-1939.88 ; -315.72,-1937.23 -307.76,-1937.23 ; -315.72,-1934.57 -307.76,-1934.57 ; -315.72,-1931.92 -307.76,-1931.92 ; -315.72,-1929.26 -307.76,-1929.26 ; -315.72,-1926.61 -307.76,-1926.61 ; -315.72,-1913.33 -307.76,-1913.33 ; -315.72,-1910.68 -307.76,-1910.68 ; -315.72,-1849.61 -307.76,-1849.61 ; -315.72,-1846.96 -307.76,-1846.96 ; -315.72,-1472.6 -307.76,-1472.6 ; -315.72,-1469.94 -307.76,-1469.94 ; -315.72,-1467.29 -307.76,-1467.29 ; -315.72,-1464.63 -307.76,-1464.63 ; -315.72,-1461.98 -307.76,-1461.98 ; -315.72,-1440.74 -307.76,-1440.74 ; -315.72,-1438.08 -307.76,-1438.08 ; -315.72,-1435.43 -307.76,-1435.43 ; -315.72,-1432.77 -307.76,-1432.77 ; -315.72,-1430.12 -307.76,-1430.12 ; -313.07,-1908.02 -307.76,-1908.02 ; -313.07,-1905.37 -307.76,-1905.37 ; -313.07,-1902.71 -307.76,-1902.71 ; -313.07,-1854.92 -307.76,-1854.92 ; -313.07,-1852.27 -307.76,-1852.27 ; -313.07,-1459.32 -307.76,-1459.32 ; -313.07,-1456.67 -307.76,-1456.67 ; -313.07,-1454.01 -307.76,-1454.01 ; -313.07,-1451.36 -307.76,-1451.36 ; -313.07,-1448.7 -307.76,-1448.7 ; -313.07,-1446.05 -307.76,-1446.05 ; -313.07,-1443.39 -307.76,-1443.39 ; -310.41,-1900.06 -307.76,-1900.06 ; -310.41,-1897.4 -307.76,-1897.4 ; -310.41,-1894.75 -307.76,-1894.75 ; -310.41,-1892.09 -307.76,-1892.09 ; -310.41,-1865.54 -307.76,-1865.54 ; -310.41,-1862.89 -307.76,-1862.89 ; -310.41,-1860.23 -307.76,-1860.23 ; -310.41,-1857.58 -307.76,-1857.58
  other v2: -2300,-2800 2300,-2800 -2300,2800 2300,2800

## Polygon pours and split planes (outlines as drawn)
VCC on Top Layer "Top Layer-No Net" (solid, remove dead copper, pour order 10): 2425,2900 -2375,2900 -2375,-1050 -2400,-2900 2425,-2900
VCC on Top Layer "Top Layer-No Net" (solid, pour order 4): 1575,-1325 1875,-1325 1875,-1525 1625,-1525 1575,-1525 1575,-1325
GND on Bottom Layer "Top Layer-No Net" (solid, remove dead copper, pour order 7): -2400,-1175 -2500,-1175 -2500,-3000 -300,-3000 -300,-2300 -2400,-2300
GND on Bottom Layer "Top Layer-No Net" (solid, remove dead copper, pour order 12): 2500,-3000 2500,3000 -2500,3000 -2500,-1175 -300,-1175 -300,-3000
GND on Bottom Layer "Top Layer-No Net" (solid, pour order 6): 1887.5,-1825 2150,-1825 2150,-2125 2150,-2150 1887.5,-2150 1875,-2150 1875,-1825
VCC on Bottom Layer "Top Layer-No Net" (solid, pour order 2): 911.67,-2350 725,-2350 725,-1850 1075,-1850 1075,-2350 958.33,-2350

## Keep-outs
Keep-Out Layer:
  circle w100: c2300,-2800 r200
  circle w100: c-2300,-2800 r200
  circle w100: c-2300,2800 r200
  circle w100: c2300,2800 r200

## Other copper
Top Layer:
  pour cut-out: 1425,-275 1425,-1260 1545,-1380 2255,-1380 2255,-405 2125,-275

## Silkscreen, mask and mechanical layers (free items; w line width, h text height)
Board Outline:
  the board outline again, w10